# EAGLE board node (EAGLE 6.3)
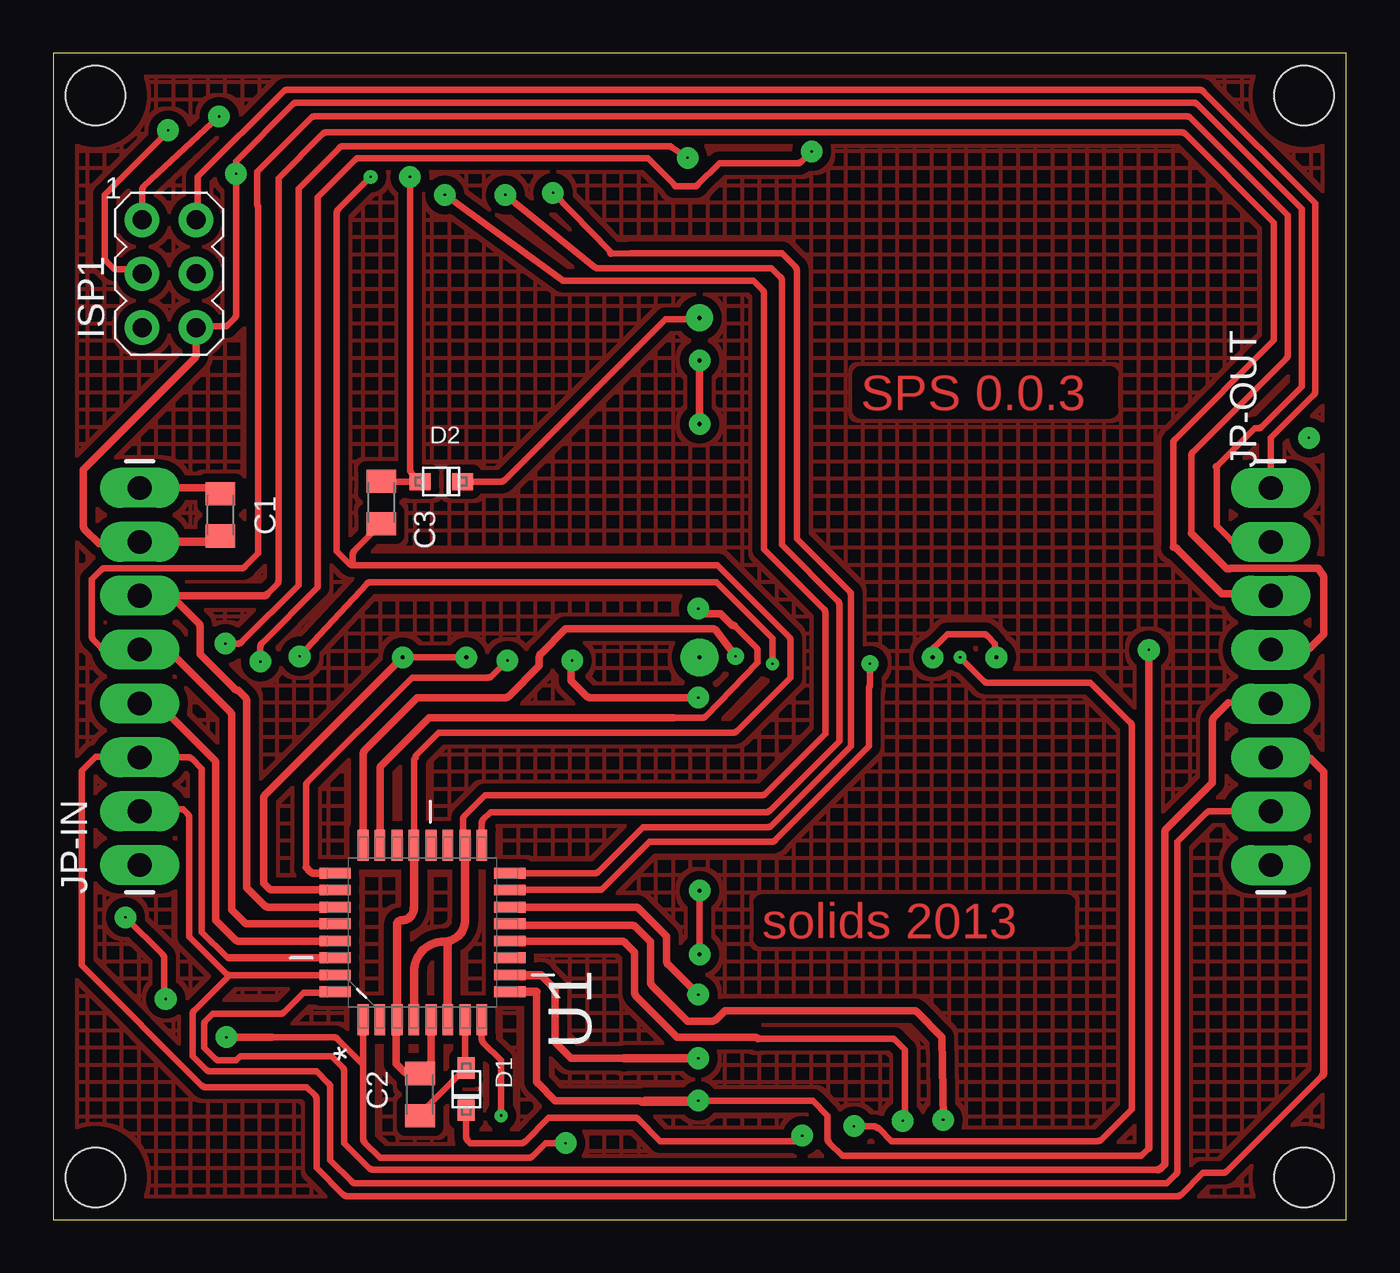
[diagram p0: board, top side]
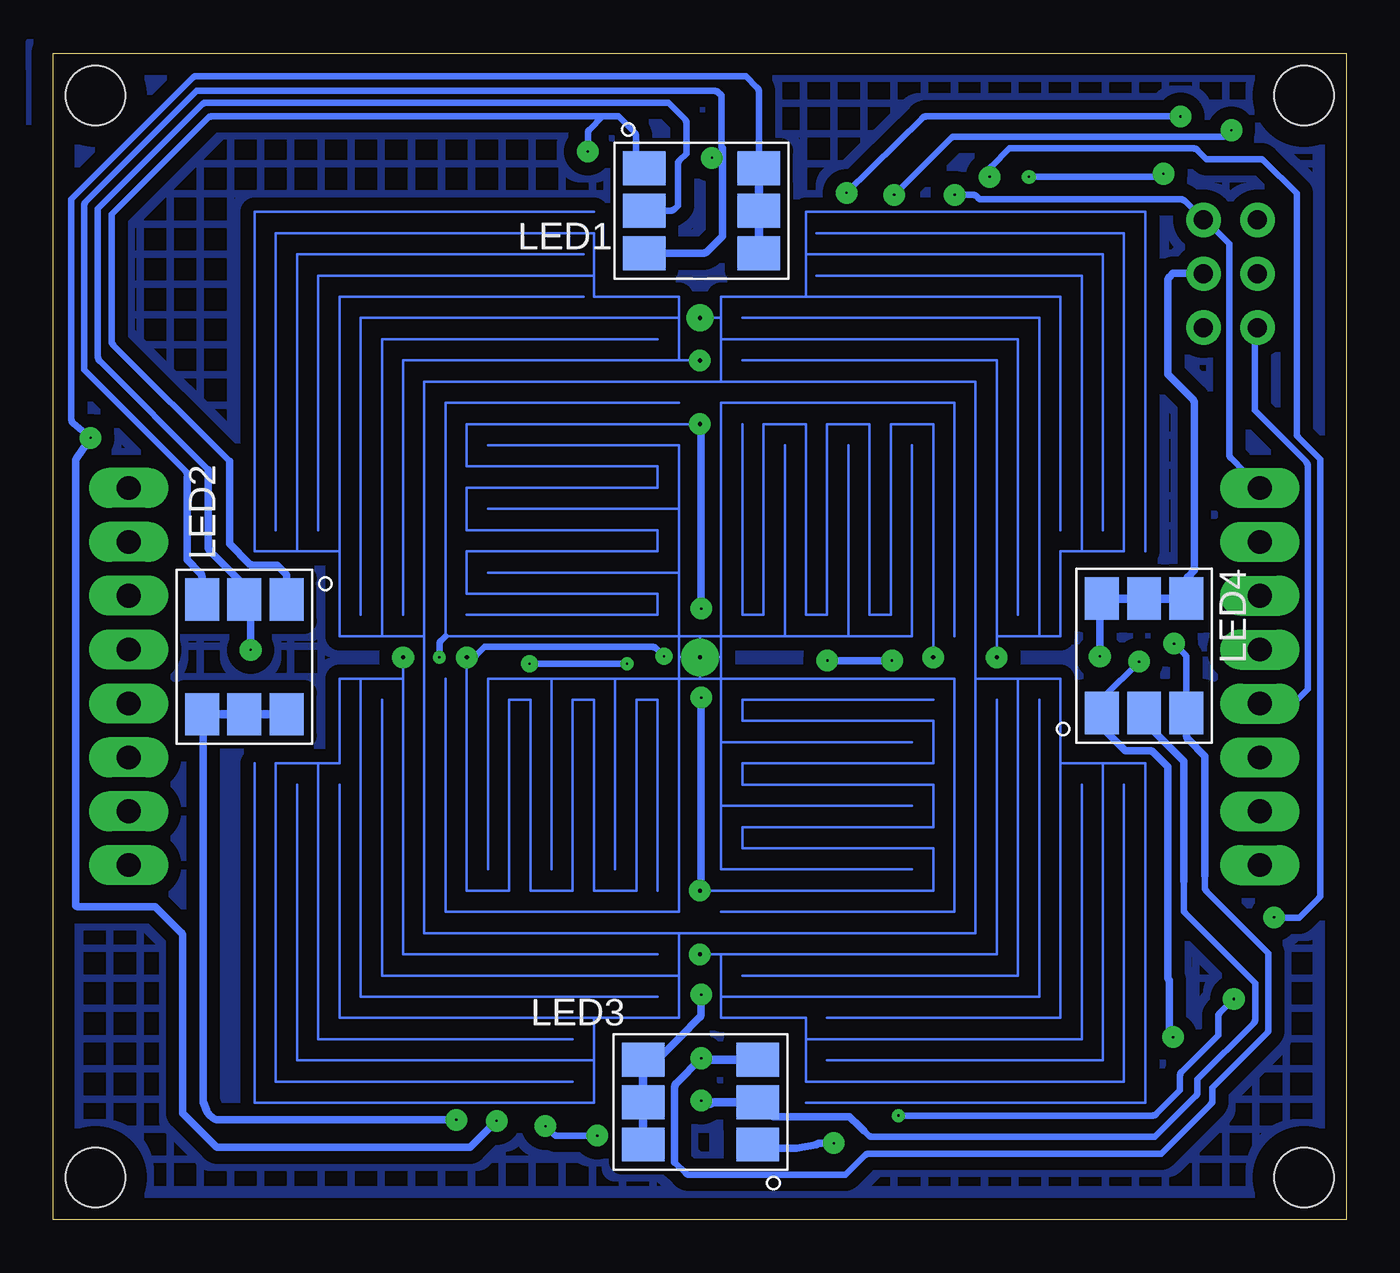
[diagram p1: board, bottom side, seen from below]

Size 61 x 55 mm. Coordinates in mm from the lower left corner, seen from the top.
Outline: 0,0 61,0 61,55 0,55 0,0
Copper layers (1*16): Top 0.035mm / dielectric 1.5mm / Bottom 0.035mm
Design rules "default": minimum track width 10mil, minimum drill 24mil, track to track 8mil, track to pad 8mil, pad to pad 8mil, via to via 8mil, smd to smd 8mil, copper to edge 40mil, drill to drill 8mil, minimum pad ring 10mil, minimum via ring 8mil, stop-mask expansion 4mil, vias tented up to drill 0mil, thermal gap 10mil
Holes 2.8 mm at 2,2 2,53 59,53 59,2

## Footprints (pad centres in the part's own frame; a part is rotated, then mirrored left to right if it is on the bottom)
C0805K = smd 1.1 x 1.4: 1 -1,0; 2 1,0
SOD-323F = smd 1 x 0.8: A -1,0; C 1,0
AVRISP = drill 0.9 pad 1.626: 1 -1.27,2.54; 2 1.27,2.54; 3 -1.27,0; 4 1.27,0; 5 -1.27,-2.54; 6 1.27,-2.54
1X08_LONGPADS = drill 1.118 pad 1.88 long: 1 0,0; 2 2.54,0; 3 5.08,0; 4 7.62,0; 5 10.16,0; 6 12.7,0; 7 15.24,0; 8 17.78,0
SMT-RGB-6PLCC = smd 2 x 1.6: 1 2.99,-1.74; 2 2.99,0.26; 3 2.99,2.26; 4 -2.41,2.26; 5 -2.41,0.26; 6 -2.41,-1.74
QFP80P900X900X120-32N = smd 1.473 x 0.508: 1 -4.115,2.794; 2 -4.115,2.007; 3 -4.115,1.194; 4 -4.115,0.406; 5 -4.115,-0.406; 6 -4.115,-1.194; 7 -4.115,-2.007; 8 -4.115,-2.794; 17 4.115,-2.794; 18 4.115,-2.007; 19 4.115,-1.194; 20 4.115,-0.406; 21 4.115,0.406; 22 4.115,1.194; 23 4.115,2.007; 24 4.115,2.794 | smd 0.508 x 1.473: 9 -2.794,-4.115; 10 -2.007,-4.115; 11 -1.194,-4.115; 12 -0.406,-4.115; 13 0.406,-4.115; 14 1.194,-4.115; 15 2.007,-4.115; 16 2.794,-4.115; 25 2.794,4.115; 26 2.007,4.115; 27 1.194,4.115; 28 0.406,4.115; 29 -0.406,4.115; 30 -1.194,4.115; 31 -2.007,4.115; 32 -2.794,4.115
SPS8-0.0.1 = drill 0.2 pad 1.016: I1 1,10; I2 12,-1; I3 1,-12; I4 -10,-1; O1 1,13; O2 15,-1; O3 1,-15; O4 -13,-1 | drill 0.2 pad 1.778: VDDI 1,-1 | drill 0.2 pad 1.27: VDDO 1,15

## Placement (x,y rotation side)
C1  10uf  [C0805K]  7.9,33.23 270 top
C2  10uf  [C0805K]  17.31,5.9 90 top
C3  10uf  [C0805K]  15.48,33.81 270 top
D1  [SOD-323F]  19.48,6.16 270 top
D2  [SOD-323F]  18.31,34.8 0 top
ISP1  AVRISP-6  [AVRISP]  5.47,44.59 0 top
JP-IN  [1X08_LONGPADS]  4.09,16.71 90 top
JP-OUT  [1X08_LONGPADS]  57.43,34.49 270 top
LED1  SMT-RGB-6PLCC  [SMT-RGB-6PLCC]  30.12,47.83 180 bottom
LED2  SMT-RGB-6PLCC  [SMT-RGB-6PLCC]  51.72,26.24 90 bottom
LED3  SMT-RGB-6PLCC  [SMT-RGB-6PLCC]  30.76,5.29 0 bottom
LED4  SMT-RGB-6PLCC  [SMT-RGB-6PLCC]  9.8,26.88 270 bottom
U1  ATMEGA88PA-AU  [QFP80P900X900X120-32N]  17.43,13.54 90 top
U$2  SPS8-0.0.1  [SPS8-0.0.1]  29.49,27.51 0 top

## Library data of the parts
C1-C3 D1 D2 ISP1 = adafruit
JP-IN JP-OUT = OndraSterver
LED1-LED4 U$2 = tmpvar
U1 = Atmel_By_element14_Batch_1; MPN: ATMEGA88PA-AU; OC_FARNELL: 1715490; OC_NEWARK: 15R0271; PACKAGE: QFP-32; SUPPLIER: Atmel

## Nets
GND: C1.2 C2.2 C3.2 ISP1.6 JP-IN.7 JP-OUT.2 U1.3 U1.5 U1.21
LED1-VDD: LED1.4 LED1.5 LED1.6 U1.12
LED2-VDD: LED2.4 LED2.5 LED2.6 U1.13
LED3-VDD: LED3.4 LED3.5 LED3.6 U1.14
LED4-VDD: ISP1.4 LED4.4 LED4.5 LED4.6 U1.15
LED-B: LED1.1 LED2.1 LED3.1 LED4.1 U1.1
LED-G: LED1.3 LED2.3 LED3.3 LED4.3 U1.10
LED-R: LED1.2 LED2.2 LED3.2 LED4.2 U1.9
MISO: ISP1.1 U1.16
N$3: D1.C U$2.VDDI
N$4: D2.C U$2.VDDO
N$7: JP-OUT.5 U1.32
RESET: ISP1.5 JP-IN.4 U1.29
RX: JP-IN.3 JP-OUT.6 U1.30
SA1: U1.23 U$2.I1 U$2.O1
SA2: U1.24 U$2.I2 U$2.O2
SA3: U1.25 U$2.I3 U$2.O3
SA4: U1.26 U$2.I4 U$2.O4
SCK: ISP1.3 U1.17
SCL: JP-IN.5 JP-OUT.4 U1.28
SDA: JP-IN.6 JP-OUT.3 U1.27
SVDDI: C2.1 D1.A U1.7
SVDDO: C3.1 D2.A U1.8
TX: JP-IN.2 JP-OUT.7 U1.31
VDD: C1.1 ISP1.2 JP-IN.8 JP-OUT.1 U1.4 U1.6 U1.18

## Tracks (layer width: path | path; a pad name or v marks a point on that pad's centre or on a via)
GND  (via drill 0.1 pad 0.65, 0.1 pad 1.02)
  Top 0.305: U1.21 17.02,21.59 arc-45 17.09,21.77 arc-45 17.16,21.94 18.18,22.96 32.08,22.96 arc45 32.25,23.03 34.78,25.56 34.78,27.3 arc45 34.71,27.48 31.33,30.86 14.13,30.86 | JP-OUT.2 55.74,31.95 arc-45 55.56,32.03 54.88,32.71 54.88,35.41 | 54.88,35.41 arc-45 54.95,35.58 56.68,37.31 56.83,37.31 arc45 57,37.38 58.88,39.26 58.88,47.66 53.95,52.59 arc45 53.77,52.66 11.49,52.66 arc45 11.31,52.59 8.63,49.91 v8.63,49.31 8.63,42.66 arc-45 8.56,42.49 8.18,42.11 6.88,42.11 arc45 ISP1.6 | 54.88,35.41 arc45 54.84,35.5 54.83,35.51 | 14.13,30.86 arc-45 13.96,30.93 13.38,31.51 13.38,47.45 arc-45 13.45,47.63 v14.98,49.16 | 14.13,30.86 14.13,31.36 arc-45 14.21,31.54 C3.2
  Top 0.35: ISP1.6 6.75,40.78 arc-45 6.67,40.6 1.43,35.36 1.43,32.72 arc45 1.5,32.54 2.18,31.86 3.89,31.86 arc45 4.07,31.93 JP-IN.7 | U1.3 arc45 16.18,9.3 16.18,7.36 16.57,6.97 arc45 16.75,6.9 C2.2 17.76,7.35 arc45 17.83,7.53 U1.5
  Top 0.406: U1.3 16.23,13.91 arc-90 16.43,14.11 arc90 17.02,14.7 U1.21 | JP-IN.7 7.63,31.95 arc90 C1.2
  Bottom 0.305: v14.98,49.16 9.13,49.16 arc-45 8.96,49.23 v8.63,49.31
LED1-VDD  (via drill 0.1 pad 1.02)
  Top 0.305: 33.25,8.54 39.55,8.54 arc-45 39.73,8.46 40.18,8.01 40.18,4.76 arc-45 40.11,4.59 v40.08,4.66
  Top 0.35: U1.12 26.8,13.13 arc-45 26.98,13.06 27.43,12.61 27.43,10.71 arc45 27.5,10.54 29.43,8.61 33.08,8.61 arc-45 33.25,8.54
  Bottom 0.305: 27.83,49.79 arc-45 27.76,49.61 LED1.6 | LED1.4 27.71,53.19 arc-45 27.79,53.37 28.33,53.91 54.23,53.91 arc-45 54.4,53.84 60.13,48.11 60.13,37.72 arc-45 60.06,37.54 v59.23,36.86
  Bottom 0.35: v59.23,36.86 59.86,35.93 arc-45 59.93,35.76 59.93,14.81 arc-45 59.81,14.76 56.18,14.76 54.95,13.53 arc45 54.88,13.36 54.88,5.01 53.35,3.48 arc-45 53.17,3.41 41.33,3.41 40.25,4.49 arc45 v40.08,4.66
  Bottom 0.406: LED1.4 LED1.5 LED1.6
LED2-VDD  (via drill 0.1 pad 1.02)
  Top 0.35: U1.13 21.99,13.95 arc-45 22.17,13.87 27.31,13.87 arc-45 27.49,13.8 28.18,13.11 28.18,11.21 arc45 28.25,11.04 29.93,9.36 31.07,9.36 arc45 31.25,9.43 31.68,9.86 40.58,9.86 arc-45 40.75,9.79 41.93,8.61 v41.98,4.71
  Bottom 0.35: LED2.4 arc45 53.93,23.72 53.93,5.56 53.75,5.13 arc-45 53.27,4.71 v41.98,4.71
  Bottom 0.406: LED2.6 LED2.5 LED2.4
LED3-VDD  (via drill 0.1 pad 1.02)
  Top 0.35: 30.07,10.61 arc-45 30.25,10.54 v30.43,10.61 29,12.04 arc-45 28.93,12.21 28.93,13.36 27.63,14.66 arc45 27.45,14.73 U1.14
  Bottom 0.35: LED3.4 33.09,7.54 arc-45 32.93,7.61 | v30.43,10.61 30.43,9.71 arc45 30.5,9.54 31.43,8.61 arc45 31.44,8.59 33.17,6.86
  Bottom 0.406: LED3.4 33.17,6.86 LED3.5 LED3.6
LED4-VDD  (via drill 0.1 pad 0.61, 0.1 pad 0.81, 0.1 pad 1.02)
  Top 0.305: v38.53,26.21 38.53,25.16 arc45 38.48,25.04 38.48,22.31 34.05,17.88 arc-45 33.88,17.81 28.13,17.81 25.94,15.62 arc-45 25.76,15.55 U1.15 | v11.63,26.56 14.81,29.99 arc-45 14.98,30.06 31.28,30.06 33.93,27.41 v33.93,26.21
  Bottom 0.305: v38.53,26.21 v33.93,26.21
  Bottom 0.35: 9.18,29.61 8.93,29.36 arc-45 8.75,29.29 LED4.4 7.54,30.14 arc45 7.47,30.32 7.18,30.61 7.18,38.51 arc-45 7.25,38.68 8.43,39.86 8.43,44.26 arc45 8.36,44.43 8.18,44.61 6.78,44.61 arc45 ISP1.4 | v11.63,26.56 11.63,29.09 arc45 11.56,29.27 LED4.6
  Bottom 0.406: LED4.6 LED4.5 LED4.4
LED-B  (via drill 0.1 pad 1.02)
  Top 0.305: v9.78,26.31 9.78,27 arc-45 9.85,27.18 12.48,29.81 12.48,48.2 14.25,49.98 arc-45 14.43,50.05 28.05,50.05 29.29,48.81 arc-45 29.33,48.71 30.23,48.71 arc45 30.4,48.78 31.43,49.81 35.12,49.81 arc45 35.3,49.88 v35.78,50.36 | U1.1 14.63,7.31 | 10.32,8.61 13.23,8.61 arc-45 13.4,8.54 14.63,7.31 | 14.63,7.31 14.63,3.81 arc45 14.71,3.63 15.43,2.91 22.43,2.91 arc45 22.6,2.98 23.23,3.61 v24.18,3.61
  Top 0.35: v8.18,8.61 10.32,8.61
  Bottom 0.305: LED4.1 11.54,24.44 arc45 11.47,24.62 v9.78,26.31 | 33.51,49.86 33.51,51.09 arc-45 33.59,51.27 34.33,52.01 35.08,52.01 | 35.08,52.01 53.52,52.01 arc-45 53.7,51.94 58.23,47.41 58.23,41.41 arc-45 58.16,41.23 52.68,35.76 | v35.78,50.36 35.78,51.2 arc45 35.71,51.38 35.08,52.01
  Bottom 0.35: 27.48,3.36 arc45 27.66,3.43 | LED4.1 11.54,23.33 arc-45 11.47,23.15 10.43,22.11 9.29,22.11 arc45 9.11,22.04 8.43,21.36 8.43,11.46 arc-45 8.36,11.29 8.36,8.89 arc-45 8.28,8.71 v8.18,8.61 | LED2.1 49.98,30.3 arc-45 50.05,30.48 50.43,30.86 51.58,30.86 arc45 51.75,30.93 52.68,31.86 52.68,35.76 | 33.51,49.86 arc45 33.33,49.79 LED1.1 | v24.18,3.61 24.82,3.61 arc-45 25,3.54 25.93,3.36 27.48,3.36 | 27.48,3.36 arc45 27.66,3.43 | 27.66,3.43 LED3.1
LED-G  (via drill 0.1 pad 1.02)
  Top 0.305: v8.13,27.16 8.72,27.16 arc45 8.9,27.23 11.58,29.91 11.58,48.6 13.51,50.54 arc-45 13.69,50.61 29.02,50.61 arc-45 29.2,50.54 v29.93,50.06
  Top 0.35: 23.01,11.53 23.68,10.86 23.68,8.46 arc45 23.75,8.29 24.43,7.61 26.93,7.61
  Top 0.406: v30.43,7.61 26.93,7.61 | U1.10 23.01,11.53
  Bottom 0.305: LED4.3 7.54,26.47 arc-45 7.62,26.65 v8.13,27.16 | 54.68,35.01 54.68,35.1 arc-45 54.75,35.28 59.53,40.06 59.53,47.8 arc45 59.46,47.98 54.23,53.21 29.79,53.21 arc45 29.61,53.14 29.48,53.01 29.48,50.63 arc-45 29.43,50.51 | v29.93,50.06 29.43,50.31 | 31.68,2.71 31.15,2.18 arc-45 30.98,2.11 23.63,2.11 22.7,3.04 arc45 22.52,3.11 8.73,3.11 6.4,5.44 arc-45 6.33,5.61 6.33,6.21 3.75,8.79 arc-45 3.68,8.96 3.68,12.57 6.61,15.5 arc45 6.68,15.68 6.68,16.21
  Bottom 0.35: LED4.3 7.54,22.83 arc-45 7.47,22.65 6.68,21.86 6.68,16.21 | 31.68,2.71 31.68,6.25 arc45 31.61,6.43 v30.43,7.61 | LED2.3 53.98,30.3 arc-45 54.05,30.48 54.68,31.11 54.68,35.01 | LED1.3 30.32,45.57 arc-45 30.15,45.64 29.43,46.36 29.43,50.31 29.43,50.51
  Bottom 0.406: LED3.3 30.36,7.54 arc90 v30.43,7.61
LED-R  (via drill 0.1 pad 1.02)
  Top 0.305: v30.43,5.61 35.83,5.61 36.53,4.91 36.53,3.81 arc45 36.6,3.64 37.23,3.01 51.22,3.01 arc45 51.4,3.08 51.68,3.37
  Top 0.35: 22.79,10.75 22.79,6.6 arc45 22.87,6.42 23.68,5.61 27.61,5.61 arc-45 LED3.2 30.27,5.54 arc45 v30.43,5.61 30.46,5.64 arc-45 30.64,5.71 | v51.68,26.86 51.68,3.37
  Top 0.406: v30.43,5.61 27.93,5.61 | U1.9 22.79,10.75
  Bottom 0.305: 53.68,35.36 58.81,40.49 arc45 58.88,40.66 58.88,47.66 53.95,52.59 arc45 53.77,52.66 31.98,52.66 31.2,51.88 arc45 31.13,51.7 31.13,50.26 31.46,49.93 arc-45 31.53,49.76 31.53,47.81 31.7,47.64 arc45 31.88,47.57 LED1.2 | 22.95,4.38 22.55,3.98 arc-45 22.38,3.91 9.03,3.91 7.1,5.84 arc-45 7.03,6.01 7.03,6.61 4.38,9.26 arc-45 4.3,9.44 4.3,11.15 7.61,14.45 arc45 7.68,14.63 7.68,15.96
  Bottom 0.35: 9.43,23.61 9.43,23.46 arc-45 9.36,23.29 7.68,21.61 7.68,15.96 | 27.48,5.36 arc45 27.66,5.43 LED3.2 27.16,4.93 arc-45 26.98,4.86 23.43,4.86 22.95,4.38 22.75,4.18 | 53.68,35.36 53.68,31.71 arc-45 53.61,31.54 52.18,30.11 52.18,29.54 arc-45 52.11,29.36 LED2.2 51.98,28.76 arc-45 51.9,28.58 51.68,28.36 v51.68,26.86
  Bottom 0.406: LED4.2 9.54,23.73 arc-90 9.43,23.61 | LED3.2 29.86,5.54 arc90 v30.43,5.61
MISO  (via drill 0.1 pad 1.02)
  Top 0.305: ISP1.1 4.21,48.53 arc-45 4.28,48.71 v7.83,52.01 | v23.58,48.41 26.28,45.66 arc45 26.3,45.54 27.23,45.56 34.38,45.56 35.01,44.93 arc-45 35.08,44.75 35.08,32.11 37.56,29.63 arc-45 37.63,29.45 37.63,22.31 33.9,18.58 arc-45 33.73,18.51 27.83,18.51 25.73,16.41 arc-45 25.55,16.33 U1.16
  Bottom 0.305: v7.83,52.01 19.82,52.01 arc-45 20,51.94 v23.58,48.41
N$1
  pour Top (isolate 0.406, hatched): -0.07,0.34 59.72,0.2 arc90 61.04,1.19 61.98,55.52 1.46,55.47 arc90 -0.32,51.96
N$2
  pour Bottom (isolate 0.61, hatched): 0.09,0.4 60.06,-0.42 arc90 61.62,0.76 62.12,55.52 1.27,55.16 arc90 -0.07,52.81
N$3  (via drill 0.1 pad 0.61, 0.1 pad 1.02)
  Top 0.305: v37.78,4.41 38.67,4.41 arc-45 38.85,4.34 arc-45 38.94,4.3 39.53,3.71 49.27,3.71 arc45 49.45,3.78 50.88,5.21 50.88,23.25 arc45 50.81,23.43 48.93,25.31 44.09,25.31 arc-45 43.91,25.38 v42.78,26.51 | D1.C 19.48,3.91 arc45 19.56,3.73 19.68,3.61 22.07,3.61 arc45 22.25,3.68 23.38,4.81 27.43,4.81 arc-45 27.6,4.74 28.63,3.71 34.98,3.71 arc45 35.15,3.78 v35.33,3.96
  Bottom 0.305: v35.33,3.96 37.23,3.96 arc45 37.4,4.03 v37.78,4.41 | v42.78,26.51 42.78,27.11 arc45 42.71,27.29 42.49,27.51
N$4
  Top 0.305: D2.C 21.11,34.8 arc45 21.29,34.87 28.88,42.46 30.37,42.46 arc45 U$2.VDDO
N$7
  Top 0.305: 55.43,24.36 57.37,24.36 arc-45 JP-OUT.5 | 52.08,2.36 15.09,2.36 arc-45 14.91,2.43 13.73,3.61 13.73,7 arc45 13.66,7.18 13.13,7.71 8.94,7.71 arc45 8.76,7.64 8.63,7.51 7.83,7.51 arc-45 7.66,7.58 7.13,8.11 7.13,9.21 arc-45 7.2,9.38 7.53,9.71 10.72,9.71 arc45 10.9,9.78 11.83,10.71 13.22,10.71 arc45 U1.32
  Top 0.35: 52.08,2.36 arc45 52.25,2.43 52.43,2.61 52.43,18.25 arc-45 52.5,18.43 54.68,20.61 54.68,23.5 arc-45 54.75,23.68 55.43,24.36
RESET
  Top 0.35: JP-IN.4 4.85,24.34 arc-45 5.03,24.26 7.61,21.68 arc-45 7.68,21.5 7.68,14.11 8.58,13.21 arc45 8.76,13.13 U1.29
  Bottom 0.305: JP-IN.4 2.6,24.34 arc-45 2.42,24.41 1.83,25 1.83,35.55 arc-45 1.9,35.72 4.33,38.15 4.33,41.83 arc45 4.26,42 ISP1.5
RX
  Top 0.305: 59.86,6.79 55.35,2.28 arc-45 55.17,2.21 54.23,2.21 53.2,1.18 arc-45 53.02,1.11 13.87,1.11 arc-45 13.69,1.18 12.43,2.45 12.43,5.69 arc45 12.35,5.87 11.97,6.25 7.2,6.25 arc-45 7.02,6.32 1.35,11.99 1.35,21.05 arc-45 1.42,21.23 2.02,21.82 4.54,21.82 arc-45 4.62,21.8 | 8.3,12.35 arc-45 8.18,12.4 7.02,13.55 7.02,21.26 6.56,21.72 arc45 6.38,21.8 4.62,21.8 | JP-IN.3 4.62,21.8
  Top 0.35: U1.30 8.3,12.35 | JP-OUT.6 59.14,21.8 arc-45 59.32,21.72 59.93,21.11 59.93,6.96 arc-45 59.86,6.79
SA1  (via drill 0.1 pad 1.02)
  Top 0.305: 29.27,23.66 30.52,23.66 arc45 30.8,23.73 33.23,26.26 33.23,26.81 arc45 33.16,26.99 32.13,28.01
  Top 0.35: U$2.I1 U$2.O1 | U1.23 15.42,21.24 arc-45 15.49,21.42 17.73,23.66 29.27,23.66 | 32.13,28.01 arc-45 31.96,28.08 31.48,28.56 30.79,28.56 arc-45 30.61,28.63 v30.43,28.81
  Bottom 0.35: v30.43,28.81 30.43,37.37 arc-45 U$2.I1
SA2  (via drill 0.1 pad 0.81)
  Top 0.305: U$2.I2 41.49,26.82 arc-45 41.56,26.99 42.18,27.61 43.88,27.61 arc-45 44.05,27.54 44.43,27.16 44.43,26.66 arc45 U$2.O2
  Top 0.35: U1.24 14.63,21.96 arc-45 14.71,22.14 17.18,24.61 21.32,24.61 arc45 21.5,24.68 22.93,26.11 22.93,26.5 arc-45 23,26.68 24.18,27.86 31.07,27.86 arc-45 31.25,27.79 v32.18,26.56
  Bottom 0.305: U$2.I2 41.24,26.51 arc-45 41.07,26.58 40.65,27 32.73,27 arc45 32.55,26.93 v32.18,26.56
  Bottom 0.35: 41.46,26.54 U$2.I2
SA3  (via drill 0.1 pad 1.02)
  Top 0.305: U$2.O3 U$2.I3 | 11.93,16.61 11.93,20.45 arc-45 12,20.63 16.93,25.56 20.52,25.56 arc45 20.7,25.63 v21.43,26.36
  Top 0.35: U1.25 12.31,16.33 arc-45 12.13,16.41 11.93,16.61 | v30.43,24.61 25.34,24.61 arc-45 25.16,24.68 24.43,25.41 24.43,26.24 arc-45 v24.48,26.36
  Bottom 0.35: v21.43,26.36 v24.48,26.36 | v30.43,24.61 30.43,15.65 arc45 U$2.I3
SA4
  Top 0.305: U$2.I4 U$2.O4
  Top 0.35: U1.26 10.35,15.55 arc-45 10.17,15.62 9.93,15.86 9.93,19.84 arc-45 10,20.02 U$2.O4
SCK  (via drill 0.1 pad 1.02)
  Top 0.305: U1.17 20.22,18.69 arc-45 20.29,18.87 20.63,19.21 33.62,19.21 arc45 33.8,19.28 37.08,22.56 37.08,29 arc45 37.01,29.18 34.38,31.81 34.38,44.26 arc45 34.31,44.43 33.88,44.86 25.68,44.86 arc-45 25.51,44.93 v21.33,48.31 | v5.43,51.36 arc-45 5.39,51.27 2.43,48.31 2.43,45.37 arc45 2.5,45.19 2.88,44.81 3.88,44.81 arc-45 4.06,44.74 ISP1.3
  Bottom 0.305: v5.43,51.36 5.66,51.13 arc45 5.83,51.06 18.48,51.06 arc-45 18.65,50.99 v21.33,48.31
SCL
  Top 0.305: 53.68,32.36 53.68,36.01 arc-45 53.75,36.18 58.16,40.59 arc45 58.23,40.77 58.23,47.36 53.65,51.94 arc45 53.48,52.01 12.34,52.01 arc45 12.16,51.94 9.63,49.41 9.63,47.88 arc45 9.68,47.76 9.68,31.41 9.05,30.78 arc-45 8.87,30.71 2.46,30.71 arc45 2.28,30.64 1.83,30.19 1.83,27.52 arc45 1.9,27.34 2.33,26.91
  Top 0.35: U1.28 9.2,13.95 arc-45 9.02,14.02 8.43,14.61 8.43,23.75 arc45 8.36,23.93 5.43,26.86 4.13,26.86 arc-45 JP-IN.5 arc45 4.01,26.91 2.33,26.91 | JP-OUT.4 59.09,26.88 arc45 59.27,26.95 59.93,27.61 59.93,30.25 arc45 59.86,30.43 59.68,30.71 55.53,30.71 arc-45 55.36,30.68 53.68,32.36
SDA
  Top 0.305: 52.83,31.71 52.83,36.6 arc-45 52.9,36.78 57.51,41.39 arc45 57.58,41.56 57.58,47.01 53.4,51.19 arc45 53.23,51.26 12.89,51.26 arc45 12.71,51.19 10.63,49.1 10.63,30.11 arc-45 10.56,29.94 10.11,29.49
  Top 0.35: JP-IN.6 5.58,29.41 | 5.58,29.41 9.93,29.41 arc45 10.11,29.49 | 52.83,31.71 arc-45 53,31.64 55.13,29.51 57.23,29.51 arc-45 57.41,29.44 JP-OUT.3 | U1.27 10.16,14.73 arc-45 9.98,14.81 9.13,15.66 9.13,24.45 arc45 9.06,24.63 8.73,24.96 arc-45 8.56,25.03 6.93,26.66 6.93,27.96 arc45 6.86,28.14 5.58,29.41
SVDDI
  Top 0.305: U1.7 19.43,7.28 arc45 D1.A 17.37,5.04 arc45 C2.1
SVDDO  (via drill 0.1 pad 0.61, 0.1 pad 1.02)
  Top 0.305: v16.83,49.16 16.83,35.38 arc45 16.9,35.2 D2.A 15.52,34.8 | 15.52,34.8 arc-45 C3.1 arc45 15.52,34.8 | U1.8 20.22,8.53 arc45 20.29,8.35 21.13,7.51 v21.13,4.91 | v5.32,10.4 5.32,10.52 arc45 5.24,10.7 5.24,12.32 arc45 5.17,12.5 v3.42,14.26
  Bottom 0.305: v21.13,4.91 9.14,4.91 arc-45 8.97,4.98 7.85,6.1 7.85,6.79 arc45 7.78,6.97 6.05,8.7 6.05,9.56 arc45 5.98,9.74 v5.32,10.4 | v3.42,14.26 arc-45 3.35,14.23 2.23,14.23 1.3,15.16 arc-45 1.23,15.34 1.23,35.84 2.28,36.89 arc45 2.35,37.07 2.35,48.38 3.9,49.93 arc-45 4.08,50 6.6,50 7.03,50.43 arc-45 7.21,50.5 15.9,50.5 16.76,49.64 arc-45 16.83,49.47 v16.83,49.16
TX
  Top 0.305: 3.96,19.31 arc-45 JP-IN.2 | JP-OUT.7 54.58,19.25 arc45 54.4,19.18 53.03,17.81 53.03,2.31 arc-45 52.96,2.14 52.53,1.71 14.28,1.71 arc-45 14.1,1.78 13.07,2.81 13.07,6.24 arc45 13,6.42 12.43,7 7.41,7 arc-45 7.23,7.07 6.58,7.71 6.58,9.68 arc-45 6.66,9.86 8.33,11.53 | 5.55,19.32 4.26,19.32 arc45 JP-IN.2 | U1.31 8.33,11.53 | 8.33,11.53 arc-45 8.15,11.61 6.42,13.34 6.42,18.95 arc45 6.35,19.13 6.13,19.35 4.29,19.35 arc45 4.11,19.28 JP-IN.2
VDD  (via drill 0.1 pad 1.02)
  Top 0.305: U1.18 arc45 19.36,17.83 19.33,17.86 19.33,18.86 arc-45 19.4,19.03 20.38,20.01 33.42,20.01 arc45 33.6,20.08 36.43,22.91 36.43,28.61 arc45 36.36,28.78 33.53,31.61 33.53,43.66 arc45 33.46,43.83 33.03,44.26 24.14,44.26 arc-45 23.96,44.33 v18.48,48.31 | ISP1.2 6.76,47.15 arc45 6.83,47.33 6.83,49.16 10.86,53.19 arc-45 11.04,53.26 54.08,53.26 arc-45 54.25,53.19 59.53,47.91 59.53,39.06 arc-45 59.46,38.89 57.43,36.86 JP-OUT.1
  Top 0.35: JP-IN.8 7.53,34.49 arc-45 7.7,34.42 C1.1
  Top 0.406: U1.18 19.43,14.11 arc-90 18.43,13.11 | U1.6 18.62,12.92 arc90 18.43,13.11 | U1.4 17.02,11.7 arc-90 18.43,13.11
  Bottom 0.305: JP-IN.8 5.46,35.91 arc45 5.53,36.09 5.53,46.01 6.59,47.07 arc-45 ISP1.2 7.64,48.03 arc-45 7.82,48.1 17.3,48.1 17.39,48.19 arc-45 17.57,48.31 v18.48,48.31
(copper drawn outside any net)
  shapes: Top circle x4

## Text on the board
Top: SPS 0.0.3 | solids 2013